# Altium PCB YLCmarlin.PcbDoc (part 3 of 3)
Units mm, origin at the board's own origin, x right, y up, seen from the top; angles counter-clockwise.
Board outline 129.92 x 100.67 mm, 2 copper layers (Top Layer, Bottom Layer); 209 components, 193 nets, 781 pads, 1168 vias.
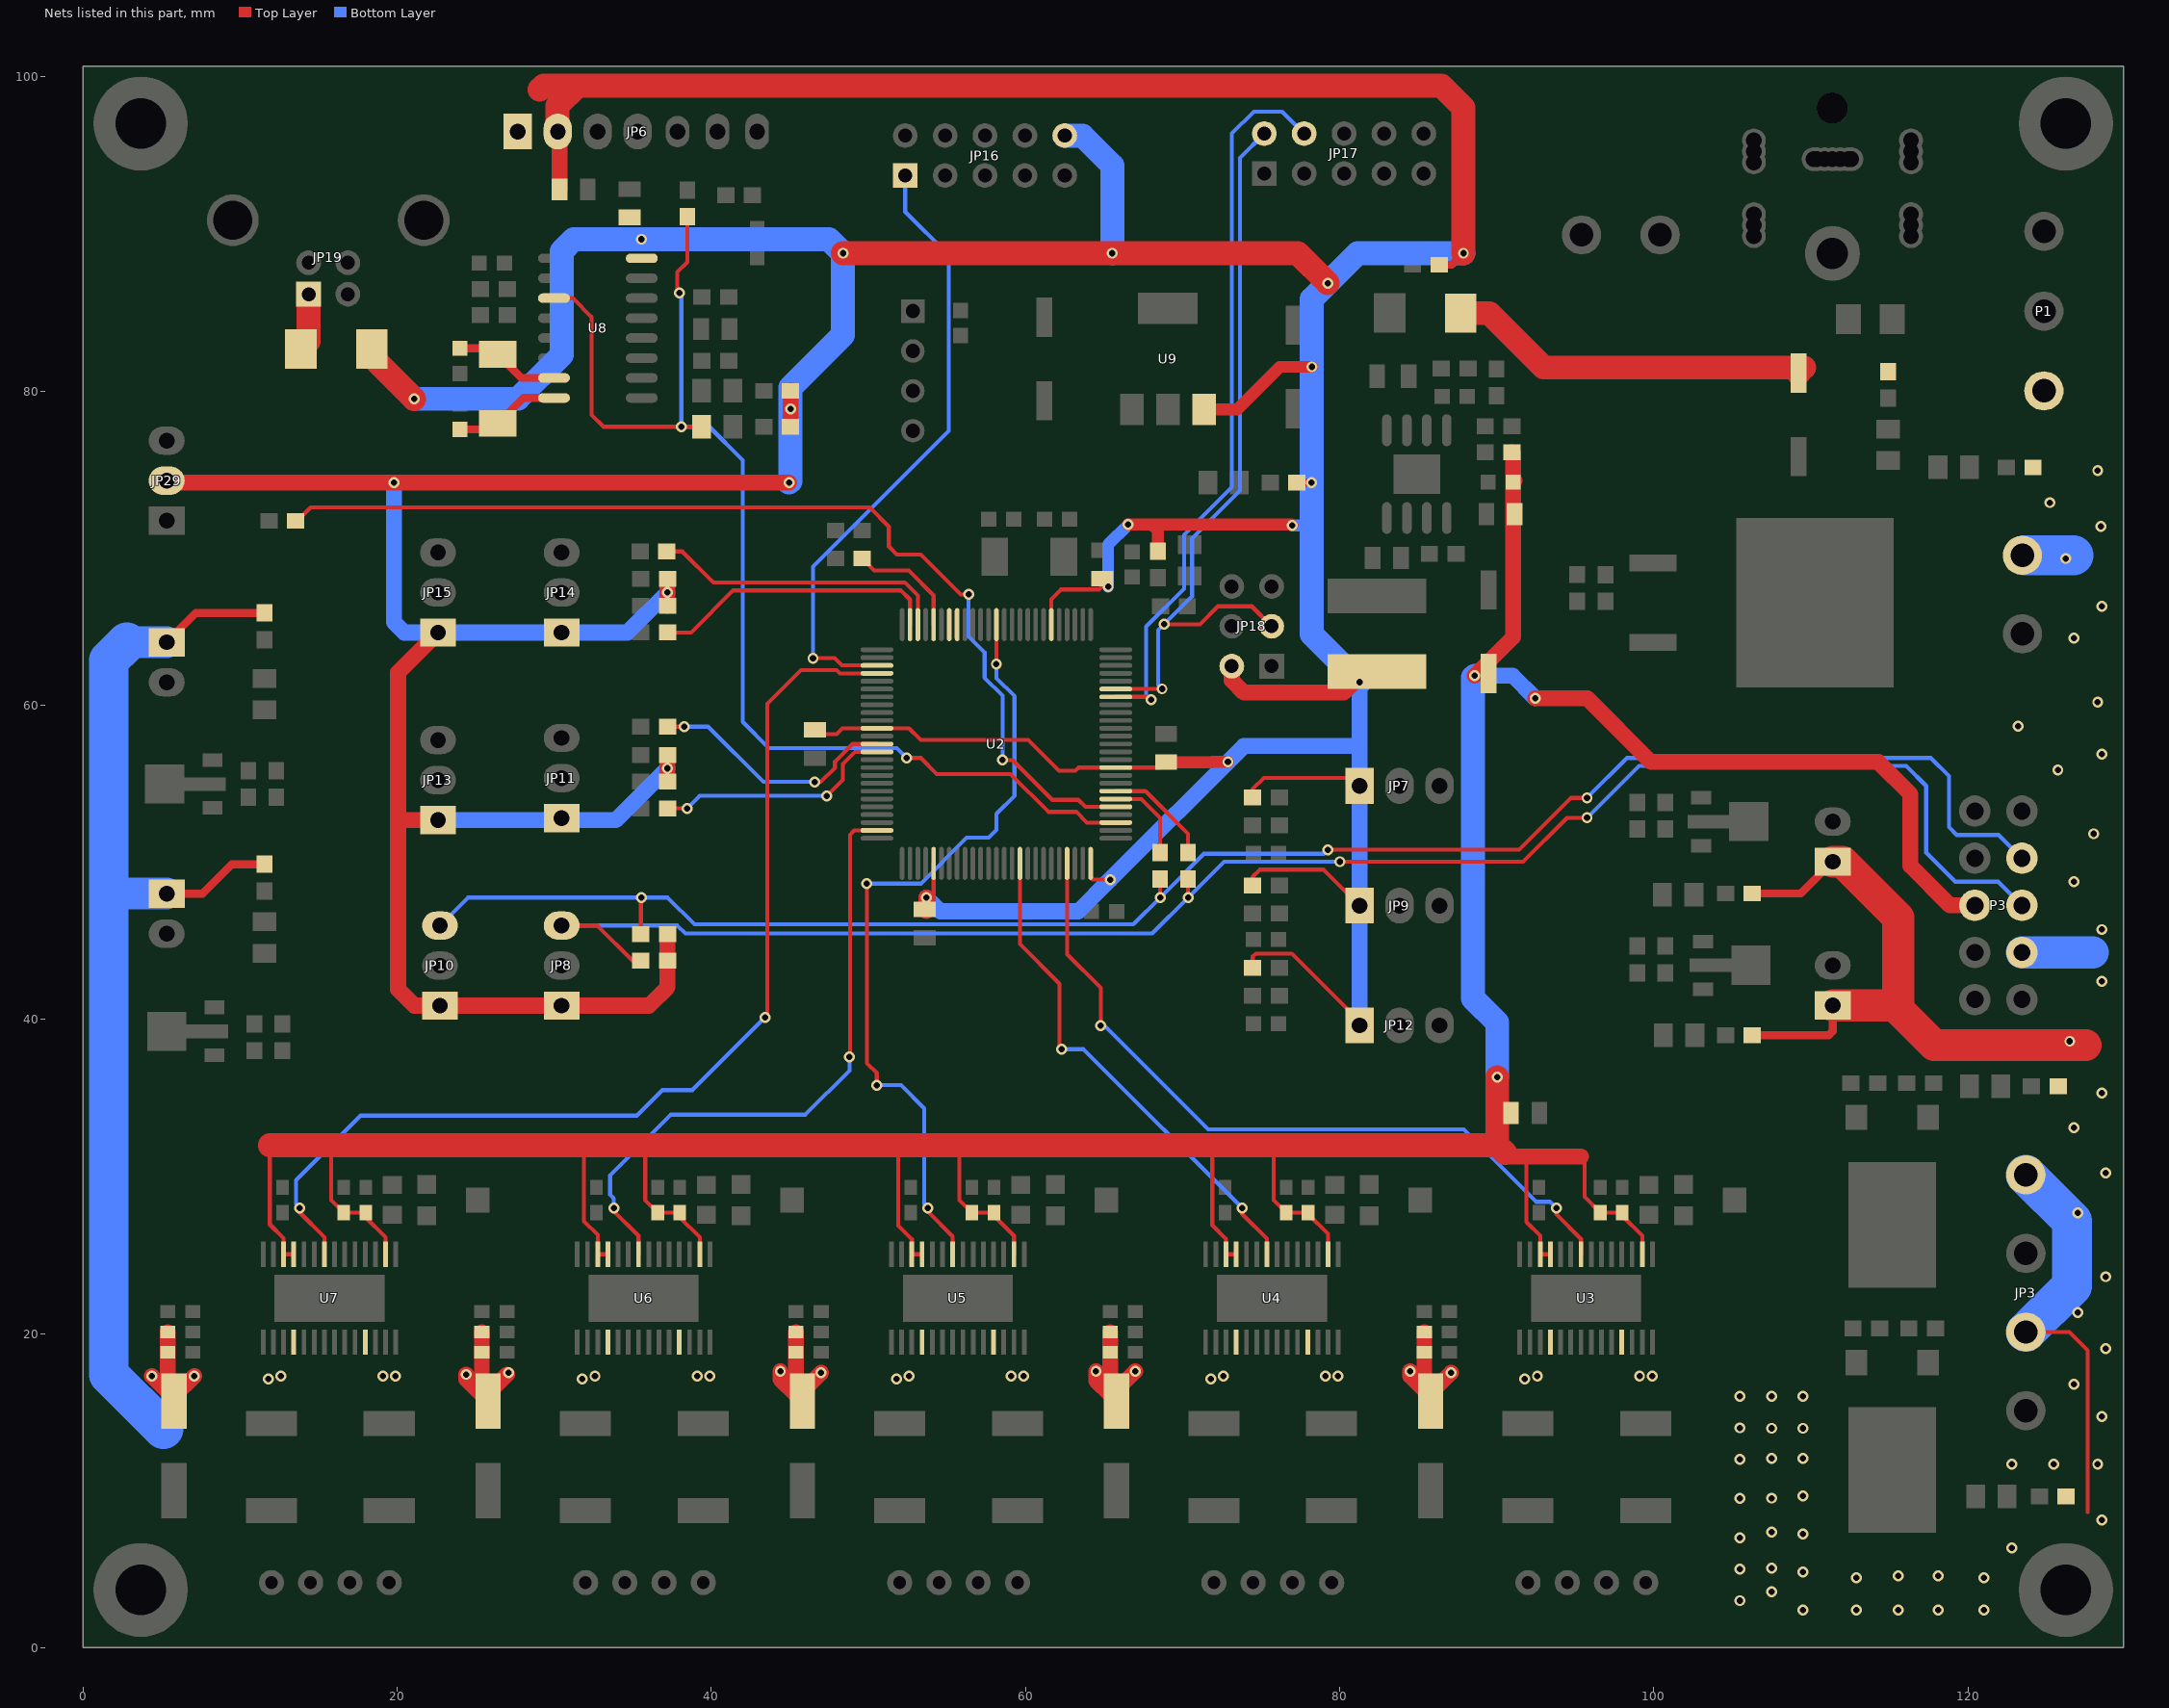
[diagram p3: the nets of this part, all layers, seen from the top]

## Via types
v1: diameter 0.7, hole 0.4, Top Layer to Bottom Layer, tented both sides, 830 vias
v2: diameter 0.7, hole 0.5, Top Layer to Bottom Layer, tented both sides, 230 vias
v3: diameter 0.7, hole 0.4, Top Layer to Bottom Layer, 108 vias

## Nets (pads, with @x,y where several pads share a name; then routed paths per layer and width w, separated by ;. In a path a pad name is that pad's centre, name@x,y a point inside that pad or via, vN(x,y) a via of type N, cw(c..) or ccw(c..) an arc to the next point about the centre after c; other vN are vias at no path point) (continued)
SD_SCK: JP17.2 JP18.3 U2.20 | length 49
  Top Layer w0.254: U2.20@65.756,61.031 68.691,61.031 v1(68.7,61.04) ; v1(68.834,65.151) 71.11,65.151 72.253,66.294 74.412,66.294 JP18.3@75.682,65.024
  Bottom Layer w0.254: v1(68.7,61.04) 68.453,61.287 68.453,64.77 v1(68.834,65.151) 70.612,66.929 70.612,70.612 73.66,73.66 73.66,94.839 JP17.2@75.209,96.388
SD_SS: JP17.4 U2.19 | length 46.5
  Top Layer w0.254: U2.19@65.756,60.531 67.809,60.531 v1(68,60.34)
  Bottom Layer w0.254: v1(68,60.34) 67.691,60.649 67.691,65.009 70.104,67.422 70.104,70.844 73.152,73.892 73.152,96.393 74.549,97.79 76.347,97.79 JP17.4@77.749,96.388
SERVO_0: R83.2 U2.5 | length 66.1
  Top Layer w0.254: R83.2@13.55,71.628 14.505,72.583 50.099,72.583 51.308,71.374 51.308,70.104 51.816,69.596 53.34,69.596 55.88,67.056 v1(56.388,67.056) ; v1(58.547,56.515) 59.182,56.515 61.722,53.975 63.373,53.975 63.817,53.531 U2.5@65.756,53.531
  Bottom Layer w0.254: v1(56.388,67.056) 56.388,64.389 57.404,63.373 57.404,61.757 58.547,60.614 v1(58.547,56.515)
SPK: JP16.1 U2.53 | length 40
  Top Layer w0.254: v1@46.355,62.992 47.869,62.992 48.33,62.531 U2.53@50.556,62.531
  Bottom Layer w0.254: v1(46.482,62.992) 46.482,68.834 55.118,77.47 55.118,88.646 52.349,91.415 JP16.1@52.349,93.721 JP16.1@52.451,93.619
STEP_E0: U2.74 U6.22 | length 40.6
  Top Layer w0.254: v1(33.8,28) 33.8,27.793 35.375,26.218 U6.22@35.375,25.05 ; v1(48.806,37.6) 48.831,37.625 48.831,51.762 49.1,52.031 U2.74@50.556,52.031
  Bottom Layer w0.254: v1(33.8,28) 33.8,28.601 33.569,28.832 33.569,30.076 37.431,33.938 45.996,33.938 48.806,36.748 v1(48.806,37.6)
STEP_E1: U2.54 U7.22 | length 67.6
  Top Layer w0.254: v1(13.8,28) 13.8,27.716 15.375,26.141 U7.22@15.375,25.05 ; v1@43.561,40.259 43.561,60.081 45.71,62.23 47.989,62.23 48.188,62.031 U2.54@50.556,62.031
  Bottom Layer w0.254: v1(13.8,28) 13.569,28.231 13.569,29.768 17.676,33.875 35.266,33.875 36.891,35.5 38.802,35.5 v1(43.434,40.132) v1@43.561,40.259
STEP_X: U2.97 U3.22 | length 48.6
  Top Layer w0.254: U2.97@62.656,49.931 62.656,44.141 64.8,41.997 v1(64.8,39.6) ; v1(93.8,28) 93.8,27.6 95.375,26.025 U3.22@95.375,25.05
  Bottom Layer w0.254: v1(64.8,39.6) 65.042,39.6 71.65,32.992 87.908,32.992 92.508,28.392 93.4,28.392 93.792,28 v1(93.8,28)
STEP_Y: U2.91 U4.22 | length 32.2
  Top Layer w0.254: U2.91@59.656,49.931 59.656,44.788 62.172,42.271 62.172,38.228 v1(62.3,38.1) ; v1(73.8,28) 73.8,27.616 75.375,26.041 U4.22@75.375,25.05
  Bottom Layer w0.254: v1(62.3,38.1) 63.7,38.1 v1(73.8,28)
STEP_Z: U2.38 U5.22 | length 50.4
  Top Layer w0.254: v1(49.911,48.641) 49.911,37.211 50.546,36.576 v1(50.546,35.814) ; v1(53.8,28) 53.8,27.755 55.375,26.18 U5.22@55.375,25.05 ; v1(58.156,62.611) U2.38@58.156,65.131
  Bottom Layer w0.254: v1(49.911,48.641) 53.34,48.641 56.261,51.562 57.658,51.562 58.166,52.07 58.166,53.086 59.309,54.229 59.309,60.569 58.156,61.722 v1(58.156,62.611) ; v1(50.546,35.814) 52.086,35.814 53.569,34.331 53.569,28.231 v1(53.8,28)
TX: D8.2 R63.2 U2.3 U8.3 | length 78
  Top Layer w0.254: U8.3@29.993,85.911 31.183,85.911 32.385,84.709 32.385,78.486 33.147,77.724 D8.2@39.386,77.724 ; v1@37.846,86.233 37.846,87.571 38.481,88.206 R63.2@38.481,91.098 ; v1(52.451,56.642) 53.34,56.642 54.356,55.626 59.055,55.626 61.468,53.213 63.236,53.213 63.918,52.531 U2.3@65.756,52.531
  Bottom Layer w0.254: v1@37.846,86.233 38.1,85.979 v1(38.1,77.724) 39.878,77.724 42,75.602 42,58.94 43.663,57.277 51.816,57.277 v1(52.451,56.642)
  other v1: 37.973,86.233
TXD1: R80.1 U2.46 | length 7.4
  Top Layer w0.254: R80.1@49.618,69.342 50.38,68.58 52.578,68.58 54.156,67.002 U2.46@54.156,65.131
USB_BZ: U2.44
USB_SS: U2.43
VBUS: D11.1 JP19.1 | length 3.7
  Top Layer w1.524: D11.1@13.879,82.68 14.371,83.172 JP19.1@14.371,86.164
VCC_5V: C5.2 C6.2 C7.1 C9.2 C10.2 C11.2 C12.2 C13.2 C14.2 C15.2 C23.1 C24.1 C25.1 C41.1 C42.1 D11.2 JP6.1 JP6.2 JP7.1 JP8.1 JP9.1 JP10.1 JP11.1 JP12.1 JP13.1 JP14.1 JP15.1 JP16.10 JP18.2 JP29.2 L1.2 P3.6 R4.1 R15.1 R20.2 R21.1 R23.1 R26.2 R27.2 R28.2 R29.2 R42.2 R43.2 R52.1 R54.1 R56.1 R58.1 R60.1 R61.1 R62.1 R65.2 R66.2 U2.10 U2.31 U2.61 U2.80 U2.100 U3.16 U3.25 U3.26 U4.16 U4.25 U4.26 U5.16 U5.25 U5.26 U6.16 U6.25 U6.26 U7.16 U7.25 U7.26 U8.16 U9.3 | length 766.2
  Top Layer w0.254: 11.9,32 11.9,26.95 12.775,26.075 U7.26@12.775,25.05 U7.25@13.425,25.05 ; 15.9,32 15.8,31.9 15.8,28.5 C42.1@16.6,27.7 R43.2@18,27.7 18,27.4 19.275,26.125 U7.16@19.275,25.05 ; 32,32 31.9,31.9 31.9,27.155 32.775,26.28 U6.26@32.775,25.05 U6.25@33.425,25.05 ; 35.8,32 35.8,28.5 C41.1@36.6,27.7 R42.2@38,27.7 38,27.4 39.275,26.125 U6.16@39.275,25.05 ; C10.2@47.145,58.166 47.996,58.166 48.361,58.531 U2.61@50.556,58.531 52.594,58.531 53.34,57.785 60.188,57.785 62.144,55.828 63.184,55.828 63.387,56.031 U2.10@65.756,56.031 68.615,56.031 C11.2@68.961,56.377 ; 51.9,32 51.9,26.879 52.775,26.004 U5.26@52.775,25.05 U5.25@53.425,25.05 ; v1@53.965,47.625 54.092,47.498 54.092,46.901 54.156,46.965 U2.80@54.156,49.931 ; 55.8,32 55.8,28.5 C25.1@56.6,27.7 R29.2@58,27.7 58,27.5 59.275,26.225 U5.16@59.275,25.05 ; U2.31@61.656,65.131 61.656,66.746 62.274,67.364 64.687,67.364 C12.2@65.141,67.818 ; U2.100@64.156,49.931 64.156,48.991 64.252,48.895 v1(65.395,48.895) ; C12.2@65.141,68.161 C12.2@65.141,67.818 ; v1(65.268,67.564) 65.141,67.437 C12.2@65.141,67.818 ; 71.9,32 71.9,26.9 72.775,26.025 U4.26@72.775,25.05 U4.25@73.425,25.05 ; R62.1@74.471,43.275 74.471,43.991 74.676,44.196 76.962,44.196 81.27,39.888 JP12.1@81.27,39.624 ; R61.1@74.471,48.514 74.471,49.071 74.93,49.53 78.984,49.53 JP9.1@81.27,47.244 ; R60.1@74.471,54.126 74.471,54.659 75.184,55.372 80.762,55.372 JP7.1@81.27,54.864 ; 75.9,32 75.8,31.9 75.8,28.5 C24.1@76.6,27.7 R28.2@78,27.7 78,27.618 79.275,26.343 U4.16@79.275,25.05 ; 92,31.276 91.9,31.176 91.9,27.1 92.775,26.225 U3.26@92.775,25.05 ; 92.925,25.05 U3.25@93.425,25.05 ; 95.377,31.276 95.6,31.053 95.6,28.7 C23.1@96.6,27.7 R27.2@98,27.7 98,27.5 99.275,26.225 U3.16@99.275,25.05
  Top Layer w0.508: R15.1@77.288,74.168 v1(78.216,74.168) ; R20.2@86.35,88.04 87.151,88.04 v1(87.884,88.773)
  Top Layer w0.762: v1(66.548,71.501) 66.929,71.501 ; R26.2@68.443,69.811 68.443,71.12 68.062,71.501 ; C11.2@68.961,56.377 71.882,56.377 71.893,56.388 v1(72.898,56.388) ; U9.3@71.388,78.822 73.482,78.822 76.2,81.54 v1(78.232,81.54) ; v1(77,71.44) 76.939,71.501 68.062,71.501 ; 66.929,71.501 67.495,71.501 ; 66.929,71.501 67.495,71.501 ; 67.495,71.501 68.062,71.501
  Top Layer w1.016: JP29.2@5.334,74.168 v1(19.812,74.168) v1(44.958,74.168) ; JP13.1@22.606,52.685 20.111,52.685 20.066,52.64 ; JP15.1@22.606,64.623 20.066,62.083 20.066,52.64 ; JP6.2@30.221,96.52 30.342,96.399 C14.2@30.342,92.837 ; R54.1@37.223,45.433 R52.1@37.223,43.733 37.223,42.049 36.048,40.874 JP8.1@30.48,40.874 JP10.1@22.733,40.874 21.102,40.874 20.066,41.91 20.066,52.64 ; R56.1@37.223,55.133 v1(37.223,55.983) R58.1@37.223,56.833 ; R21.1@37.223,66.333 v1(37.223,67.183) R23.1@37.223,68.033 ; R65.2@45.046,77.724 v1(45.046,78.867) R66.2@45.046,80.01 ; C9.2@53.711,46.901 v1(53.711,47.752) ; JP18.2@73.142,62.484 73.142,61.574 73.914,60.802 80.27,60.802 81.618,62.151 L1.2@82.38,62.151 L1.2@80.488,62.151 ; v1(88.603,61.884) 91.054,64.335 C5.2@91.054,74.203 ; 90.551,31.492 90.551,31.276 92,31.276 95.377,31.276 ; R4.1@90.977,76.108 91.054,76.03 C5.2@91.054,74.203 ; C5.2@91.142,74.29 C5.2@91.054,74.203 ; v1(92.456,60.452) 95.758,60.452 99.822,56.388 114.3,56.388 116.332,54.356 116.332,49.784 118.855,47.261 P3.6@120.444,47.261
  Top Layer w1.524: 11.9,32 15.9,32 32,32 35.8,32 51.9,32 55.8,32 71.9,32 75.9,32 90.043,32 ; D11.2@18.404,82.674 18.404,82.18 v1(21.082,79.502) v1@21.079,79.499 ; 29.083,99.187 29.337,99.441 31.496,99.441 ; JP6.2@30.221,96.52 30.221,98.166 31.496,99.441 ; v1(48.387,88.773) v1(65.532,88.773) 77.343,88.773 v1(79.248,86.868) ; L1.2@81.618,62.151 81.417,62.352 L1.2@82.38,62.151 ; v1(87.884,88.773) 87.884,98.044 86.487,99.441 31.496,99.441 ; v1(90.043,36.322) 90.043,34.036 ; C13.2@90.513,34.036 90.043,34.036 ; 90.551,31.492 90.043,32 ; 90.043,32 90.043,34.036
  Bottom Layer w0.762: v1(65.268,67.564) 65.268,70.221 v1(66.548,71.501) ; v1(77,71.44) 78.132,71.44 78.232,71.34
  Bottom Layer w1.016: v1(19.812,74.168) 19.812,65.278 20.467,64.623 JP15.1@22.606,64.623 JP14.1@30.48,64.623 34.663,64.623 v1(37.223,67.183) ; JP13.1@22.606,52.685 33.925,52.685 v1(37.223,55.983) ; 27.686,79.502 27.813,79.375 ; v1(53.711,47.752) 54.581,46.882 63.382,46.882 v1(65.395,48.895) 73.904,57.404 81.27,57.404 ; JP12.1@81.27,39.624 JP9.1@81.27,47.244 JP7.1@81.27,54.864 81.27,57.404 ; v1(81.28,61.468) 81.27,61.458 81.27,57.404 ; v1(88.603,61.884) 91.024,61.884 v1(92.456,60.452)
  Bottom Layer w1.524: v1(21.082,79.502) 27.686,79.502 30.48,82.296 30.48,88.9 31.242,89.662 v1(35.56,89.662) 47.498,89.662 v1(48.387,88.773) 48.387,83.566 45.046,80.225 v1(45.046,78.867) 45.046,74.256 v1(44.958,74.168) ; JP16.10@62.509,96.261 63.632,96.261 65.532,94.361 v1(65.532,88.773) ; v1(81.28,61.468) 78.232,64.516 78.232,71.34 v1(78.232,81.54) 78.232,85.852 v1(79.248,86.868) 81.153,88.773 v1(87.884,88.773) ; v1(88.603,61.884) 88.5,61.78 88.5,41.34 90.043,39.797 v1(90.043,36.322)
VCC_12V: C3.1 C26.1 C27.1 C28.1 C29.1 C30.1 C31.1 C32.1 C33.1 C34.1 C43.1 C44.1 C45.1 C46.1 C47.1 C48.1 D1.1 JP2.1 JP3.1 JP3.3 JP4.1 JP5.1 JP25.1 JP27.1 P1.3 P3.7 R1.1 R2.1 R10.1 R13.1 R17.1 R67.1 R74.1 R77.1 U3.4 U3.11 U4.4 U4.11 U5.4 U5.11 U6.4 U6.11 U7.4 U7.11 | length 213.7
  Top Layer w0.254: JP3.3@123.698,20.099 126.459,20.099 127.635,18.923 127.635,8.636
  Top Layer w0.508: JP27.1@5.334,48.006 7.62,48.006 9.486,49.872 R77.1@11.557,49.872 ; JP4.1@5.334,64.008 7.2,65.874 R74.1@11.557,65.874 ; R1.1@106.281,38.99 111.146,38.99 111.4,39.244 JP2.1@111.4,40.89 ; R67.1@106.281,48.018 109.378,48.018 JP25.1@111.4,50.04
  Top Layer w1: v1(4.4,17.3) C44.1@5.4,16.3 ; C46.1@5.4,20.1 C48.1@5.4,18.8 C44.1@5.4,16.3 ; v1(7.1,17.3) 5.8,16 5.8,15.9 C44.1@5.4,16.3 ; v1(24.4,17.4) 24.4,17.1 C43.1@25.4,16.1 ; C45.1@25.4,20.1 C47.1@25.4,18.8 C43.1@25.4,16.1 ; v1@27,17.4 25.8,16.2 C43.1@25.8,15.7 C43.1@25.4,16.1 ; v1(44.4,17.6) 44.4,17.1 C28.1@45.4,16.1 ; C31.1@45.4,20.1 C34.1@45.4,18.8 C28.1@45.4,16.1 ; v1(47,17.5) 45.8,16.3 C28.1@45.8,15.7 C28.1@45.4,16.1 ; v1(64.5,17.6) 64.5,17 C27.1@65.4,16.1 ; C30.1@65.4,20.1 C33.1@65.4,18.8 C27.1@65.4,16.1 ; v1(67,17.6) 65.8,16.4 C27.1@65.8,15.7 C27.1@65.4,16.1 ; v1(84.5,17.6) 84.5,17.3 C26.1@85.4,16.4 ; C29.1@85.4,20.1 C32.1@85.4,18.8 C26.1@85.4,16.4 ; v1(87.1,17.5) 85.7,16.1 C26.1@85.4,16.4
  Top Layer w1.524: D1.1@87.721,84.96 89.538,84.96 93.002,81.496 109.568,81.496 C3.1@109.22,81.149
  Top Layer w2.032: JP2.1@111.4,40.89 115.32,40.89 115.57,40.64 ; JP25.1@111.4,50.04 112.012,50.04 115.57,46.482 115.57,40.64 ; 127.508,38.354 117.856,38.354 115.57,40.64
  Bottom Layer w2.032: 1.651,48.006 JP27.1@5.334,48.006 ; 2.794,64.008 JP4.1@5.334,64.008 ; P3.7@123.444,44.261 127.951,44.261
  Bottom Layer w2.54: 2.794,64.008 1.651,62.865 1.651,48.006 1.651,17.399 5.128,13.922 ; JP5.1@123.6,69.54 126.718,69.54 ; JP3.3@123.698,20.099 126.619,23.02 126.619,27.178 JP3.1@123.698,30.099
  other v1: 109.5,2.413 112.903,2.413 115.57,2.413 118.11,2.413 121.031,2.413 105.5,3 107.5,3.556 112.903,4.445 121.031,4.445 115.57,4.572 118.11,4.572 109.5,4.826 105.5,5 107.5,5.08 122.809,6.35 105.5,7 109.5,7.239 107.5,7.366 128.524,8.128 105.5,9.5 107.5,9.525 109.5,9.652 122.809,11.684 125.476,11.684 128.27,11.684 105.5,12 107.5,12.065 109.5,12.065 107.5,13.97 109.5,13.97 105.5,14 128.524,14.732 105.5,16 107.5,16 109.5,16 126.746,16.764 11.8,17.1 31.8,17.1 51.8,17.1 71.8,17.1 91.8,17.1 12.6,17.3 19.1,17.3 19.9,17.3 32.6,17.3 39.1,17.3 39.9,17.3 52.6,17.3 59.1,17.3 59.9,17.3 72.6,17.3 79.1,17.3 79.9,17.3 92.6,17.3 99.1,17.3 99.9,17.3 27.1,17.5 128.778,19.05 127,21.336 128.778,23.622 127,27.686 128.778,30.226 126.746,33.099 128.524,35.306 126.492,38.608 128.524,42.418 128.524,45.72 126.746,48.768 128.016,51.816 125.73,55.88 128.524,56.896 123.19,58.674 128.27,60.198 126.746,64.262 128.524,66.294 126.238,69.342 128.473,71.374 125.222,72.898 128.27,74.93
XI: C55.1 U8.7 Y2.1 | length 6.8
  Top Layer w0.508: C55.1@24.003,82.715 26.038,82.715 Y2.1@26.416,82.337 27.922,80.831 U8.7@29.993,80.831
XMAX: R24.2 U2.48 | length 19
  Top Layer w0.254: R24.2@37.172,69.786 38.164,69.786 40.132,67.818 52.324,67.818 53.156,66.986 U2.48@53.156,65.131
XMIN: R22.2 U2.49 | length 18.4
  Top Layer w0.254: R22.2@37.223,64.633 38.725,64.633 41.402,67.31 52.07,67.31 52.656,66.724 U2.49@52.656,65.131
XO: C54.1 U8.8 Y2.2 | length 6.8
  Top Layer w0.508: C54.1@24.003,77.559 26.038,77.559 Y2.2@26.416,77.937 28.04,79.561 U8.8@29.993,79.561
YMAX: R59.2 U2.63 | length 16
  Top Layer w0.254: R59.2@37.223,58.633 v1(38.273,58.633) ; v1(46.599,55.118) 46.98,55.118 47.879,56.017 47.879,56.405 49.005,57.531 U2.63@50.556,57.531
  Bottom Layer w0.254: v1(38.273,58.633) 39.807,58.633 43.322,55.118 45.085,55.118 v1(46.599,55.118)
YMIN: R57.2 U2.64 | length 15.5
  Top Layer w0.254: R57.2@37.223,53.433 v1(38.473,53.433) ; v1(47.361,54.229) 48.377,55.245 48.377,56.261 49.147,57.031 U2.64@50.556,57.031
  Bottom Layer w0.254: v1(38.473,53.433) 39.269,54.229 v1(47.361,54.229) v1@47.488,54.229
ZMAX: R55.2 U2.6 | length 5.5
  Top Layer w0.254: U2.6@65.756,54.031 67.381,54.031 68.58,52.832 R55.2@68.58,50.634
ZMAX_E: JP10.3 P3.3 R54.2 R55.1 | length 114.6
  Top Layer w0.254: R54.2@35.523,45.433 35.523,47.715 v1(35.56,47.752) ; v1(68.58,47.752) R55.1@68.58,48.934 ; v1(79.248,50.8) 91.44,50.8 94.742,54.102 v1(95.758,54.102)
  Bottom Layer w0.254: JP10.3@22.733,45.974 24.511,47.752 v1(35.56,47.752) 37.23,47.752 38.935,46.047 66.875,46.047 v1(68.58,47.752) 71.374,50.546 78.994,50.546 v1(79.248,50.8) ; v1(95.758,54.102) 98.298,56.642 117.642,56.642 118.8,55.484 118.8,52.24 119.3,51.74 121.965,51.74 P3.3@123.444,50.261
ZMIN: R53.2 U2.7 | length 6.9
  Top Layer w0.254: U2.7@65.756,54.531 67.389,54.531 67.643,54.531 70.358,51.816 R53.2@70.358,50.634
ZMIN_E: JP8.3 P3.5 R52.2 R53.1 | length 110.9
  Top Layer w0.254: JP8.3@30.48,45.974 32.766,45.974 35.007,43.733 R52.2@35.523,43.733 ; v1(70.358,47.752) R53.1@70.358,48.934 ; v1(80.01,50.038) 91.694,50.038 94.488,52.832 v1(95.758,52.832)
  Bottom Layer w0.254: JP8.3@30.48,45.974 37.846,45.974 38.354,45.466 68.072,45.466 v1(70.358,47.752) 72.644,50.038 v1(80.01,50.038) ; v1(95.758,52.832) 99.06,56.134 116.078,56.134 117.348,54.864 117.348,50.626 119.206,48.768 121.937,48.768 P3.5@123.444,47.261
pads on no net: U2.1 U2.4 U2.8 U2.9 U2.14 U2.27 U2.28 U2.29 U2.37 U2.39 U2.40 U2.41 U2.42 U2.47 U2.52 U2.58 U2.65 U2.66 U2.67 U2.69 U2.70 U2.78 U2.79 U2.87 U2.88 U2.92 U2.93 U2.94 U3.17 U3.18 U3.23 U3.27 U4.17 U4.18 U4.23 U4.27 U5.17 U5.18 U5.23 U5.27 U6.17 U6.18 U6.23 U6.27 U7.17 U7.18 U7.23 U7.27 U8.9 U8.10 U8.11 U8.12 U8.14 U8.15

## Polygon pours and split planes (outlines as drawn)
GND on Bottom Layer "Top Overlay-No Net" (solid, pour order 38): 0,100.668 129.921,100.668 129.921,0 0,0
VCC_12V on Bottom Layer "Bottom Layer-No Net" (solid, remove dead copper, pour order 29): 106.68,0 106.68,4.77 106.68,7.62 106.934,7.874 111.369,7.874 119.126,7.874 119.126,14.224 120.396,14.224 122.174,16.002 122.174,19.558 122.174,82.296 129.921,82.296 129.921,0
GND on Top Layer "Top Overlay-No Net" (solid, remove dead copper, pour order 36): 0,100.668 129.921,100.668 129.921,0 0,0
NetD4_2 on Top Layer "Bottom Layer-No Net" (solid, remove dead copper, pour order 31): 111.76,17.272 111.76,12.446 111.76,6.604 112.776,6.604 119.093,6.604 119.126,6.637 119.126,7.366 119.126,7.62 120.65,9.144 120.65,11.176 120.65,12.192 121.158,12.7 121.412,12.954 122.682,12.954 125.095,12.954 125.1,12.959 125.1,17.78 121.666,17.78 121.666,19.558 113.792,19.558 111.76,17.526
E0_MOS on Top Layer "Bottom Layer-No Net" (solid, remove dead copper, pour order 34): 111.887,22.86 112.649,22.098 113.284,22.098 125.1,22.098 125.1,28.067 121.793,28.067 121.666,28.194 121.666,31.242 121.666,34.036 121.158,34.544 120.396,35.306 117.094,35.306 113.284,35.306 111.76,33.782 111.76,22.86
VCC_12V on Top Layer "Bottom Layer-No Net" (solid, remove dead copper, pour order 27): 106.68,0 106.68,4.318 106.68,7.112 106.68,7.775 106.779,7.874 109.474,7.874 117.602,7.874 118.872,9.144 122.174,12.446 122.174,74.93 122.174,82.296 129.921,82.296 129.921,0

## Keep-outs
Keep-Out Layer:
  the board outline again, w0.203

## Other copper
Top Layer:
  rectangle net GND: 96.266,62.484 98.812,66.795
  rectangle net GND: 65.024,76.708 67.564,79.756
  rectangle net GND: 70.358,72.898 72.39,75.692
  rectangle net GND: 75.964,76.962 78.232,80.036
  rectangle net VCC_12V: 104,0.762 110.998,17.5
  rectangle net NetD7_2: 98.431,67.161 102.495,68.177
  region net NetC2_1: 83.396,76.489 83.396,84.966 81.364,84.966 81.364,76.489
  rectangle net VCC_5V: 26.543,95.377 30.607,100.02
  region net F0_MOS: 104.161,55.506 102.637,55.506 102.637,54.744 104.161,54.744
  region net F1_MOS: 104.669,46.737 102.637,46.737 102.637,45.721 104.669,45.721
  region net F1_MOS: 112.67,46.61 109.622,46.61 109.622,42.673 112.67,42.673
  region net F1_MOS: 109.749,46.74 104.542,46.74 104.542,40.006 109.749,40.006
  region net F0_MOS: 112.797,55.506 109.495,55.506 109.495,51.696 112.797,51.696
  region net F0_MOS: 109.749,55.506 104.034,55.506 104.034,49.283 109.749,49.283
  rectangle net E0_MOS: 121.793,31.877 123.063,33.401
  rectangle net E0_MOS: 115.824,32.639 116.332,34.163
  rectangle net E0_MOS: 115.824,31.53 119.126,32.639
  rectangle net E0_MOS: 118.872,33.655 120.65,36.576
  rectangle net E0_MOS: 118.872,32.004 121.92,33.909
  rectangle net E0_MOS: 121.793,22.098 125.1,28.067
  rectangle net E0_MOS: 112.141,22.86 113.538,32.131
  rectangle net E0_MOS: 113.03,22.098 121.92,32.131
  rectangle net NetD4_2: 119.126,16.256 121.793,19.357
  region net GND: 87.46,77.632 87.46,74.838 88.476,74.838 88.476,77.632
  region net GND: 87.079,74.965 87.079,70.901 89.873,70.901 89.873,74.965
  region net GND: 81.745,75.981 81.745,73.441 83.65,73.441 83.65,75.981
  region net NetD7_2: 114.687,61.827 103.384,61.827 103.384,60.176 114.687,60.176
  region net GND: 86.19,75.981 86.19,73.441 88.222,73.441 88.222,75.981
  region net GND: 86.571,72.933 86.571,70.774 89.238,70.774 89.238,72.933
  region net NetD7_2: 121.164,73.765 102.422,73.765 102.422,61.7 121.164,61.7
  region net NetC1_1: 81.999,72.933 81.999,70.647 83.269,70.647 83.269,72.933
  region net NetC1_1: 81.364,73.06 81.364,67.726 83.015,67.726 83.015,73.06
  region net NetD7_2: 124.829,67.669 116.592,67.669 116.592,61.065 124.829,61.065
  region net NetD7_2: 100.971,72.749 99.955,72.749 99.955,70.336 100.971,70.336
  region net NetD7_2: 100.209,72.114 99.32,72.114 99.32,70.218 100.209,70.218
  region net GND: 101.606,66.907 98.304,66.907 98.304,61.192 101.606,61.192
  rectangle net E0_MOS: 117.094,23.622 124.968,26.416
  rectangle net NetD4_2: 112.395,12.954 125.095,16.51
  rectangle net NetD7_2: 102.114,59.182 117.799,70.082
  rectangle net VCC_5V: 34.036,88.265 36.576,91.059
  region net VCC_5V: 90.125,60.74 90.125,63.407 79.2,63.407 79.2,60.74
  rectangle net NetD4_2: 121.666,15.24 125.1,17.78
  rectangle net NetD4_2: 111.887,6.637 119.126,16.51
  rectangle net VCC_12V: 106.172,10.922 110.998,15.24
  rectangle net NetF1_2: 109.474,83.058 113.284,90.678
  rectangle net NetF1_1: 114.117,83.058 126.746,86.868
  rectangle net NetF1_2: 93.472,83.058 110.236,87.884
  rectangle net NetF1_2: 93.472,86.106 98.298,91.948
  rectangle net VCC_12V: 108.966,80.772 125.73,82.296
  rectangle net VCC_12V: 122.428,77.978 127,81.788
  rectangle net VCC_12V: 122.174,68.072 125.984,72.136
  rectangle net VCC_12V: 122.428,43.18 125.222,45.212
  rectangle net VCC_12V: 122.174,18.345 125.984,21.59
  rectangle net NetD13_2: 0.762,50.8 7.112,62.357
  rectangle net NetD14_2: 0.508,35.814 7.366,46.482
  rectangle net 3.3V: 64.4,80.34 73.7,87.64
  rectangle net GND: 98.816,88.392 102.616,91.693
  rectangle net VCC_12V: 123.698,73.66 125.476,76.454
  rectangle net VCC_12V: 123.698,28.702 127,32.512
  rectangle net VCC_12V: 122.449,28.585 124.813,31.496
  rectangle net VCC_12V: 125.73,8.128 127.635,10.922
  region net VCC_12V: 17.8,20.3 18.2,20.3 18.2,18.4 18.9,17.7 20.2,17.7 20.3,17.6 20.3,17 20.2,16.9 18.9,16.9 17.8,18
  region net VCC_12V: 13.2,20.3 13.6,20.3 13.6,17.8 12.5,16.7 11.6,16.7 11.4,16.9 11.4,17.3 11.6,17.5 12.2,17.5 13.2,18.5
  region net NetJ5_4: 13.8,20.3 14.35,20.3 14.35,16.8 12.85,15.3 10.1,15.3 10.1,7.7 13,4.8 13,3.5 12.5,3 11.4,3 11,3.4 7.9,6.5 7.9,15.4 9,16.5 12.7,16.5 13.8,17.6
  region net NetJ5_3: 15.1,20.3 15.575,20.3 15.575,3.425 15.15,3 13.875,3 13.375,3.5 13.375,7 14.125,7.75 14.125,15.375 15.1,16.35
  region net NetJ5_2: 16.3,20.295 16.3,16.375 17.35,15.325 17.35,7.85 18.1,7.1 18.1,3.475 17.625,3 16.25,3 15.825,3.425 15.825,20.295
  region net NetJ5_1: 17.1,20.3 17.575,20.3 17.575,17.85 18.775,16.65 22.625,16.65 23.675,15.6 23.675,6.525 20.15,3 18.9,3 18.4,3.5 18.4,4.7 21.4,7.7 21.4,15.3 18.375,15.3 17.1,16.575
  region net VCC_12V: 37.8,20.3 38.2,20.3 38.2,18.4 38.9,17.7 40.2,17.7 40.3,17.6 40.3,17 40.2,16.9 38.9,16.9 37.8,18
  region net VCC_12V: 33.2,20.3 33.6,20.3 33.6,17.8 32.5,16.7 31.6,16.7 31.4,16.9 31.4,17.3 31.6,17.5 32.2,17.5 33.2,18.5
  region net NetJ4_4: 33.8,20.3 34.35,20.3 34.35,16.8 32.85,15.3 30.1,15.3 30.1,7.7 33,4.8 33,3.5 32.5,3 31.4,3 31,3.4 27.9,6.5 27.9,15.4 29,16.5 32.7,16.5 33.8,17.6
  region net NetJ4_3: 35.1,20.3 35.575,20.3 35.575,3.425 35.15,3 33.875,3 33.375,3.5 33.375,7 34.125,7.75 34.125,15.375 35.1,16.35
  region net NetJ4_2: 36.3,20.295 36.3,16.375 37.35,15.325 37.35,7.85 38.1,7.1 38.1,3.475 37.625,3 36.25,3 35.825,3.425 35.825,20.295
  region net NetJ4_1: 37.1,20.3 37.575,20.3 37.575,17.85 38.775,16.65 42.625,16.65 43.675,15.6 43.675,6.525 40.15,3 38.9,3 38.4,3.5 38.4,4.7 41.4,7.7 41.4,15.3 38.375,15.3 37.1,16.575
  region net VCC_12V: 57.8,20.3 58.2,20.3 58.2,18.4 58.9,17.7 60.2,17.7 60.3,17.6 60.3,17 60.2,16.9 58.9,16.9 57.8,18
  region net VCC_12V: 53.2,20.3 53.6,20.3 53.6,17.8 52.5,16.7 51.6,16.7 51.4,16.9 51.4,17.3 51.6,17.5 52.2,17.5 53.2,18.5
  region net NetJ3_4: 53.8,20.3 54.35,20.3 54.35,16.8 52.85,15.3 50.1,15.3 50.1,7.7 53,4.8 53,3.5 52.5,3 51.4,3 51,3.4 47.9,6.5 47.9,15.4 49,16.5 52.7,16.5 53.8,17.6
  region net NetJ3_3: 55.1,20.3 55.6,20.3 55.6,3.45 55.15,3 53.875,3 53.375,3.5 53.375,7 54.125,7.75 54.125,15.375 55.1,16.35
  region net NetJ3_2: 56.3,20.295 56.3,16.375 57.35,15.325 57.35,7.85 58.1,7.1 58.1,3.475 57.625,3 56.25,3 55.8,3.45 55.8,20.295
  region net NetJ3_1: 57.1,20.3 57.575,20.3 57.575,17.85 58.775,16.65 62.625,16.65 63.675,15.6 63.675,6.525 60.15,3 58.9,3 58.4,3.5 58.4,4.7 61.4,7.7 61.4,15.3 58.375,15.3 57.1,16.575
  region net VCC_12V: 77.8,20.3 78.2,20.3 78.2,18.4 78.9,17.7 80.2,17.7 80.3,17.6 80.3,17 80.2,16.9 78.9,16.9 77.8,18
  region net VCC_12V: 73.2,20.3 73.6,20.3 73.6,17.8 72.5,16.7 71.6,16.7 71.4,16.9 71.4,17.3 71.6,17.5 72.2,17.5 73.2,18.5
  region net NetJ2_4: 73.8,20.3 74.35,20.3 74.35,16.8 72.85,15.3 70.1,15.3 70.1,7.7 73,4.8 73,3.5 72.5,3 71.4,3 71,3.4 67.9,6.5 67.9,15.4 69,16.5 72.7,16.5 73.8,17.6
  region net NetJ2_3: 75.1,20.3 75.575,20.3 75.575,3.425 75.15,3 73.875,3 73.375,3.5 73.375,7 74.125,7.75 74.125,15.375 75.1,16.35
  region net NetJ2_2: 76.3,20.295 76.3,16.375 77.35,15.325 77.35,7.85 78.1,7.1 78.1,3.475 77.625,3 76.25,3 75.825,3.425 75.825,20.295
  region net NetJ2_1: 77.1,20.3 77.575,20.3 77.575,17.85 78.775,16.65 82.625,16.65 83.675,15.6 83.675,6.525 80.15,3 78.9,3 78.4,3.5 78.4,4.7 81.4,7.7 81.4,15.3 78.375,15.3 77.1,16.575
  region net NetJ1_1: 97.1,20.3 97.575,20.3 97.575,17.85 98.775,16.65 102.625,16.65 103.675,15.6 103.675,6.525 100.15,3 98.9,3 98.4,3.5 98.4,4.7 101.4,7.7 101.4,15.3 98.375,15.3 97.1,16.575
  region net NetJ1_2: 96.3,20.295 96.3,16.375 97.35,15.325 97.35,7.85 98.1,7.1 98.1,3.475 97.625,3 96.25,3 95.825,3.425 95.825,20.295
  region net NetJ1_3: 95.1,20.3 95.575,20.3 95.575,3.425 95.15,3 93.875,3 93.375,3.5 93.375,7 94.125,7.75 94.125,15.375 95.1,16.35
  region net NetJ1_4: 93.8,20.3 94.35,20.3 94.35,16.8 92.85,15.3 90.1,15.3 90.1,7.7 93,4.8 93,3.5 92.5,3 91.4,3 91,3.4 87.9,6.5 87.9,15.4 89,16.5 92.7,16.5 93.8,17.6
  region net VCC_12V: 93.2,20.3 93.6,20.3 93.6,17.8 92.5,16.7 91.6,16.7 91.4,16.9 91.4,17.3 91.6,17.5 92.2,17.5 93.2,18.5
  region net VCC_12V: 97.8,20.3 98.2,20.3 98.2,18.4 98.9,17.7 100.2,17.7 100.3,17.6 100.3,17 100.2,16.9 98.9,16.9 97.8,18
  pour cut-out: 0,67.24 13.5,67.24 14,66.74 14,39.04 18.9,34.14 88.392,34.036 88.392,34.798 19.05,34.798 14.478,39.37 14.478,66.802 13.716,67.564 0,67.564
  pour cut-out: 0,78.24 14.478,78.232 16.51,76.2 42.926,76.2 42.926,76.708 16.764,76.708 14.732,78.74 0,78.74
Bottom Layer:
  rectangle net VCC_12V: 0.6,11.1 5.1,35.3
  rectangle net GND: 114.935,88.519 117.856,97.79
  rectangle net GND: 107.442,93.493 114.3,96.139
  rectangle net GND: 113.665,87.122 117.983,91.44
  rectangle net GND: 97.409,87.376 108.712,99.949
  rectangle net GND: 31.877,95.123 36.322,100.203
  region net F0_MOS: 112.924,48.902 109.368,48.902 109.368,47.759 112.924,47.759
  region net F0_MOS: 112.797,55.506 109.241,55.506 109.241,51.696 112.797,51.696
  region net F1_MOS: 112.797,39.752 109.368,39.752 109.368,38.355 112.797,38.355
  region net F1_MOS: 112.67,46.864 109.317,46.864 109.317,42.597 112.67,42.597
  region net F0_MOS: 109.749,55.506 102.637,55.506 102.637,47.759 109.749,47.759
  region net F1_MOS: 109.749,46.864 102.637,46.864 102.637,38.355 109.749,38.355
  rectangle net VCC_12V: 0.381,13.97 3.175,17.272
  rectangle net VCC_12V: 0.381,11.049 111,18.2
  rectangle net E0_MOS: 120.904,23.622 124.587,26.416
  rectangle net E0_MOS: 111.887,22.86 113.538,36.322
  rectangle net E0_MOS: 111.789,22.098 121.285,36.957
  rectangle net NetD4_2: 111.887,6.637 119.126,20.574
  rectangle net NetD4_2: 117.856,12.954 125.095,16.637
  region net NetD7_2: 116.973,70.082 101.86,70.082 101.86,59.182 116.973,59.182
  rectangle net VCC_12V: 125.984,7.62 129.413,68.501
  rectangle net NetD7_2: 101.606,68.685 112.02,73.384
  rectangle net VCC_12V: 121.545,66.272 125.736,68.558
  rectangle net NetF1_2: 109.474,83.058 113.284,90.678
  rectangle net NetF1_1: 114.117,83.058 126.746,86.868
  rectangle net VCC_12V: 122.682,77.978 127,82.042
  rectangle net VCC_12V: 122.174,67.564 125.984,71.882
  rectangle net NetD13_2: 3.302,50.631 8.89,58.42
  rectangle net NetD14_2: 3.302,35.814 8.89,43.18
  rectangle net VCC_12V: 122.174,27.94 125.984,32.258
  rectangle net VCC_12V: 122.174,17.78 126.238,22.352
  rectangle net VCC_12V: 104,0.762 111.125,17.5
  pour cut-out: 0,67.24 13.5,67.24 14,66.74 14,39.04 18.9,34.14 88.392,34.036 88.392,34.798 19.05,34.798 14.478,39.37 14.478,66.802 13.716,67.564 0,67.564
  pour cut-out: 0,78.74 0,78.24 14.478,78.232 16.51,76.2 42.926,76.2 42.926,76.708 16.764,76.708 14.732,78.74

## Silkscreen, mask and mechanical layers (free items; w line width, h text height)
Top Overlay:
  lines w0.127: 116.078,94.488 116.205,94.615
  lines w0.2: 66.548,37.846 70.098,37.846 70.104,37.852 70.104,43.688 70.358,43.942 71.374,43.942 72.39,44.958 ; 72.39,46.736 73.406,46.736 ; 72.39,48.514 73.406,48.514 ; 73.406,44.958 72.39,44.958 ; 73.406,50.546 72.39,50.546 72.39,44.958
  lines w0.254: 35.052,37.084 35.052,41.91 37.592,41.91 37.592,41.148 37.084,41.148 37.084,40.386 37.592,40.386 37.592,38.862 37.084,38.862 37.084,38.1 37.592,38.1 37.592,37.084 35.052,37.084
  text "24V" at 96.012,95.758 h1 r90
  text "GND" at 101.012,95.631 h1 r90
  text "GND" at 119.126,89.154 h1 r90
  text "SD" at 77.724,88.646 h1
  text "LCD" at 54.737,88.519 h1
  text "3.3V" at 48.006,84.582 h1
  text "IN" at 119.126,84.074 h1 r90
  text "TXD" at 48.006,82.042 h1
  text "PWM" at 4.064,80.264 h1
  text "RXD" at 48.006,79.502 h1
  text "OUT" at 119.126,78.994 h1 r90
  text "GND" at 48.006,76.962 h1
  text "G" at 9.154,76.21 h1
  text "V" at 9.154,73.66 h1
  text "S" at 9.159,71.105 h1
  text "X" at 16.891,66.421 h1
  text "+FAN3-" at 8.89,65.532 h1 r270
  text "BED" at 117.856,65.532 h1 r90
  text "ISP" at 78.486,62.357 h1 r90
  text "Y" at 16.891,54.61 h1
  text "E1_T" at 90.815,52.959 h1 r90
  text "+FAN4-" at 8.89,49.53 h1 r270
  text "+FAN1-" at 94.996,49.216 h1 r90
  text "B_T" at 90.815,45.339 h1 r90
  text "extruder" at 128.524,43.434 h1 r90
  text "Z" at 17.018,42.672 h1
  text "S" at 35.824,40.386 h1
  text "EcubMaker" at 49.52,40.335 h1
  text "+FAN2-" at 94.996,39.878 h1 r90
  text "G" at 35.824,38.862 h1
  text "KIM-C02" at 45.456,38.049 h1
  text "E2_T" at 90.815,37.719 h1 r90
  text "V" at 35.824,37.338 h1
  text "2020-06-19" at 45.456,36.525 h1
  text "MAX" at 21.717,35.814 h1
  text "MIN" at 29.21,35.814 h1
  text "V" at 81.026,35.052 h1
  text "S" at 83.576,35.052 h1
  text "G" at 86.126,35.052 h1
  text "E1" at 129.299,26.934 h1 r90
  text "E2" at 129.299,16.934 h1 r90
  text "X" at 102.743,3.175 h1
  text "E1" at 42.545,3.048 h1
  text "E2" at 22.479,2.921 h1
  text "Y" at 82.677,2.921 h1
  text "Z" at 62.611,2.794 h1
  text "1A" at 23.114,0.889 h1 r90
  text "1B" at 24.638,0.889 h1 r90
  text "2A" at 26.162,0.889 h1 r90
  text "2B" at 27.686,0.889 h1 r90
  text "1A" at 43.18,0.889 h1 r90
  text "1B" at 44.704,0.889 h1 r90
  text "2A" at 46.228,0.889 h1 r90
  text "2B" at 47.752,0.889 h1 r90
  text "1A" at 63.246,0.889 h1 r90
  text "1B" at 64.77,0.889 h1 r90
  text "2A" at 66.294,0.889 h1 r90
  text "2B" at 67.818,0.889 h1 r90
  text "1A" at 83.312,0.889 h1 r90
  text "1B" at 84.836,0.889 h1 r90
  text "2A" at 86.36,0.889 h1 r90
  text "2B" at 87.884,0.889 h1 r90
  text "1A" at 103.251,0.889 h1 r90
  text "1B" at 104.775,0.889 h1 r90
  text "2A" at 106.299,0.889 h1 r90
  text "2B" at 107.823,0.889 h1 r90
Bottom Overlay:
  lines w0.2: 7.72,48.102 8.604,48.102 ; 7.72,64.104 8.604,64.104 ; 8.162,47.66 8.162,48.544 ; 8.162,63.662 8.162,64.546 ; 21.07,40.874 32.08,40.874 ; 21.07,43.424 32.08,43.424 ; 21.07,45.974 32.08,45.974 ; 21.07,52.812 32.08,52.812 ; 21.07,55.362 32.08,55.362 ; 21.07,57.912 32.08,57.912 ; 21.07,64.623 32.08,64.623 ; 21.07,67.173 32.08,67.173 ; 21.07,69.723 32.08,69.723 ; 108.966,40.888 109.85,40.888 ; 108.966,50.038 109.85,50.038 ; 109.408,40.446 109.408,41.33 ; 109.408,49.596 109.408,50.48 ; 129.288,55.372 114.808,55.372 114.808,39.116 129.299,39.116 ; 129.299,55.383 129.299,39.116 ; 129.299,39.116 129.299,39.116
  lines w0.203: 120.171,65.857 120.171,64.587 121.314,64.587 ; 120.171,68.356 120.171,69.54 121.568,69.54 ; 120.269,16.416 120.269,15.146 121.412,15.146 ; 120.269,18.915 120.269,20.099 121.666,20.099 ; 120.269,26.416 120.269,25.146 121.412,25.146 ; 120.269,28.915 120.269,30.099 121.666,30.099
  lines w0.254: 81.27,37.192 81.28,57.658 ; 83.81,37.192 83.82,57.658 ; 86.36,37.192 86.36,57.658
  text "LCD" at 58.42,98.298 h1
  text "SD" at 80.772,98.298 h1
  text "24V" at 94.996,92.456 h1 r270
  text "GND" at 99.996,92.456 h1 r270
  text "RX" at 39.878,91.694 h1 r270
  text "TX" at 37.473,91.577 h1 r270
  text "5V" at 27.178,91.44 h1 r270
  text "5V" at 29.464,91.44 h1 r270
  text "GND" at 32.258,90.678 h1 r270
  text "GND" at 34.798,90.678 h1 r270
  text "GND" at 122.809,89.662 h1
  text "3.3V" at 50.8,84.582 h1
  text "24V_IN" at 122.809,84.582 h1
  text "TXD" at 50.8,82.042 h1
  text "RXD" at 50.8,79.502 h1
  text "24V_OUT" at 122.809,79.502 h1
  text "GND" at 7.366,77.216 h1 r180
  text "GND" at 50.8,76.962 h1
  text "+5V" at 7.366,74.676 h1 r180
  text "S" at 8.636,72.136 h1 r90
  text "S" at 20.574,69.215 h1
  text "BED" at 119.634,68.326 h1 r90
  text "G" at 20.574,66.675 h1
  text "X" at 17.399,66.486 h1
  text "FAN3" at 2.815,64.39 h1 r90
  text "V" at 20.574,64.135 h1
  text "S" at 20.574,57.404 h1
  text "G" at 20.574,54.864 h1
  text "Y" at 17.399,54.548 h1
  text "E1_T" at 91.694,54.356 h1
  text "FAN1" at 114.321,53.22 h1 r90
  text "T+" at 118.872,52.832 h1
  text "GND" at 128.524,52.832 h1
  text "EcubMaker" at 55.626,52.753 h1
  text "V" at 20.574,52.324 h1
  text "KIM-C02" at 59.436,50.546 h1
  text "GND" at 118.872,49.784 h1
  text "ZMAX" at 128.778,49.784 h1
  text "2020-06-19" at 59.436,48.768 h1
  text "FAN4" at 2.815,48.388 h1 r90
  text "B_T" at 91.694,46.736 h1
  text "5V" at 118.872,46.736 h1
  text "ZMIN" at 128.778,46.736 h1
  text "S" at 20.574,45.466 h1
  text "FAN2" at 114.321,44.07 h1 r90
  text "FAN1" at 118.872,43.688 h1
  text "24V" at 127.762,43.688 h1
  text "G" at 20.574,42.926 h1
  text "Z" at 17.526,42.672 h1
  text "FAN2" at 118.872,40.688 h1
  text "H0" at 127.254,40.64 h1
  text "V" at 20.574,40.386 h1
  text "E2_T" at 91.694,39.116 h1
  text "MAX" at 24.13,35.814 h1
  text "MIN" at 31.75,35.814 h1
  text "V" at 81.661,35.433 h1
  text "S" at 84.201,35.433 h1
  text "G" at 86.868,35.433 h1
  text "E1" at 120.904,28.194 h1 r90
  text "E2" at 120.904,18.542 h1 r90

## Dimensions
0,0 to 0,100.668 on Top Overlay
0,0 to 129.921,0 on Top Overlay

## Text inside footprints (layer, text, board x,y; h text height)
C2: Top Overlay "+" at 74.214,84.846 h1 r180
C3: Top Overlay "+" at 106.345,81.798 h1 r180
C7: Top Overlay "+" at 92.367,61.365 h1
C57: Top Overlay "+" at 58.339,85.354 h1 r180
JP19: Top Overlay "Vcc" at 9.871,85.769 h1; Top Overlay "Gnd" at 11.596,89.344 h1; Top Overlay "D-" at 18.371,85.519 h1; Top Overlay "D+" at 16.546,89.394 h1